# Altium PCB sara-n210_breakout.PcbDoc
Units mm, origin at the board's own origin, x right, y up, seen from the top; angles counter-clockwise.
Board outline 25 x 62.55 mm, 4 copper layers (L1, L2, L3 (PWR), L4), stack 1.584 mm thick; 29 components, 24 nets, 180 pads, 60 vias.
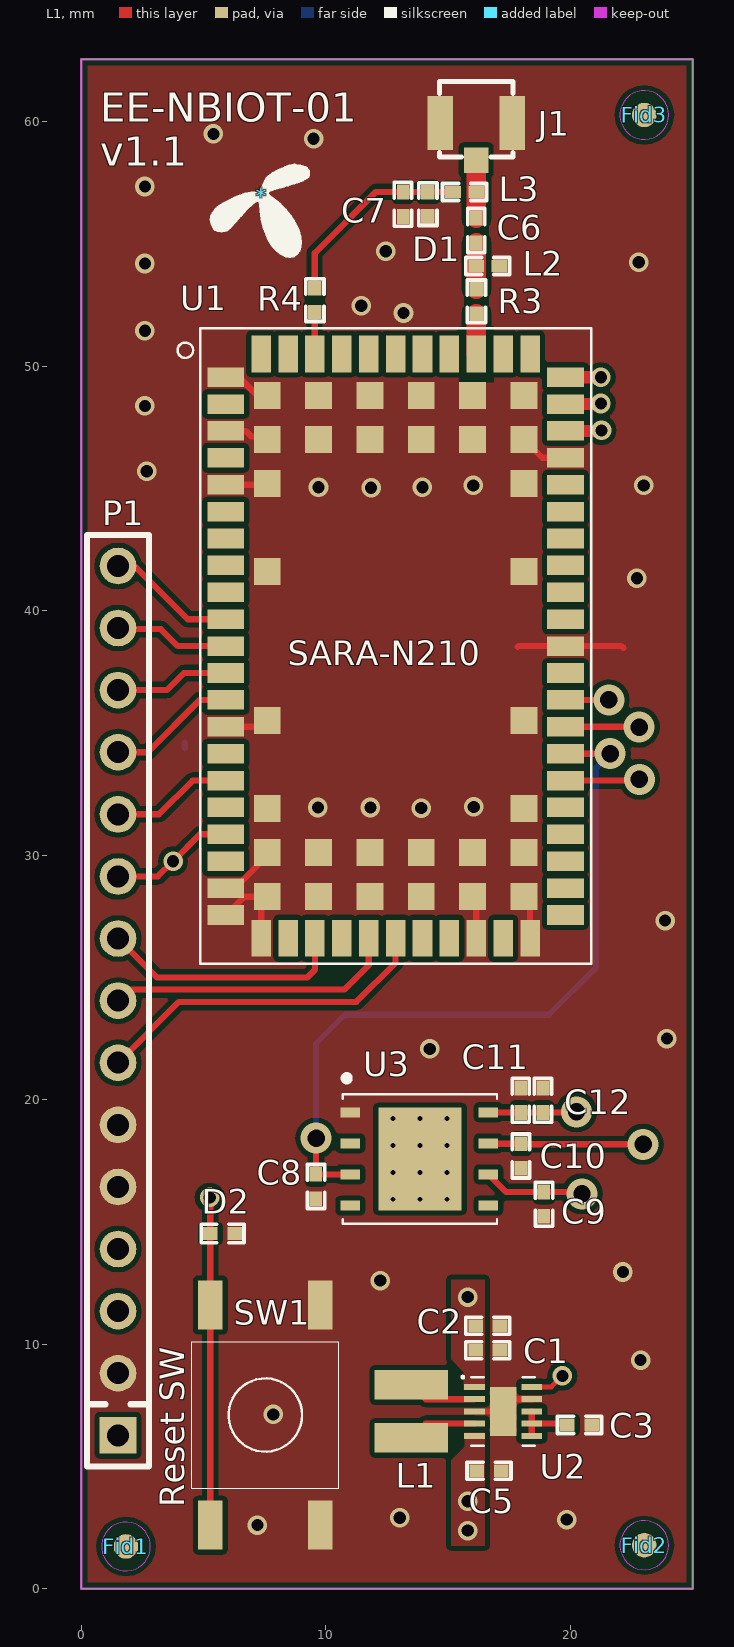
[diagram p0: L1 view]
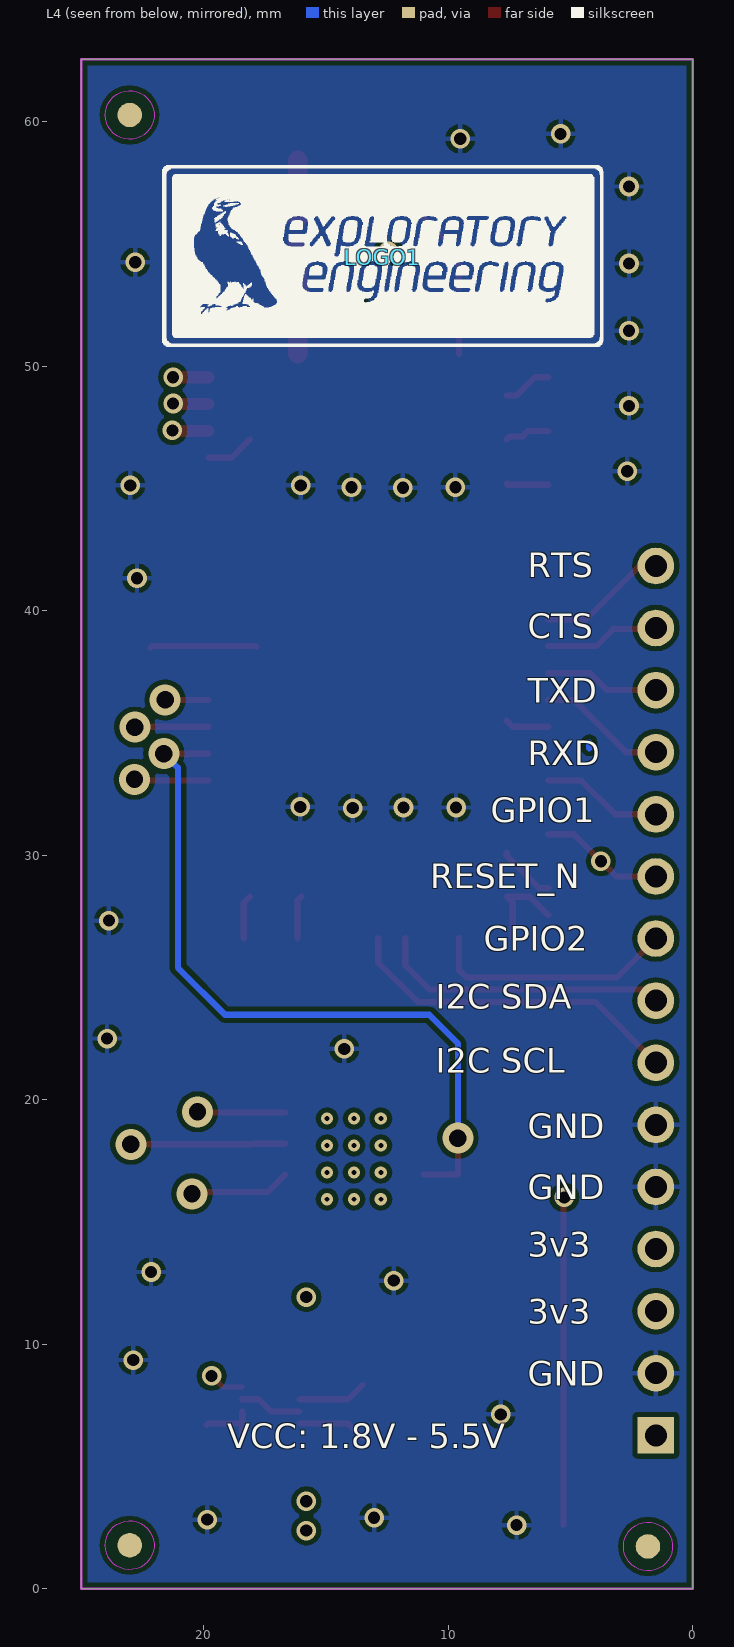
[diagram p1: L4 view, seen from below]
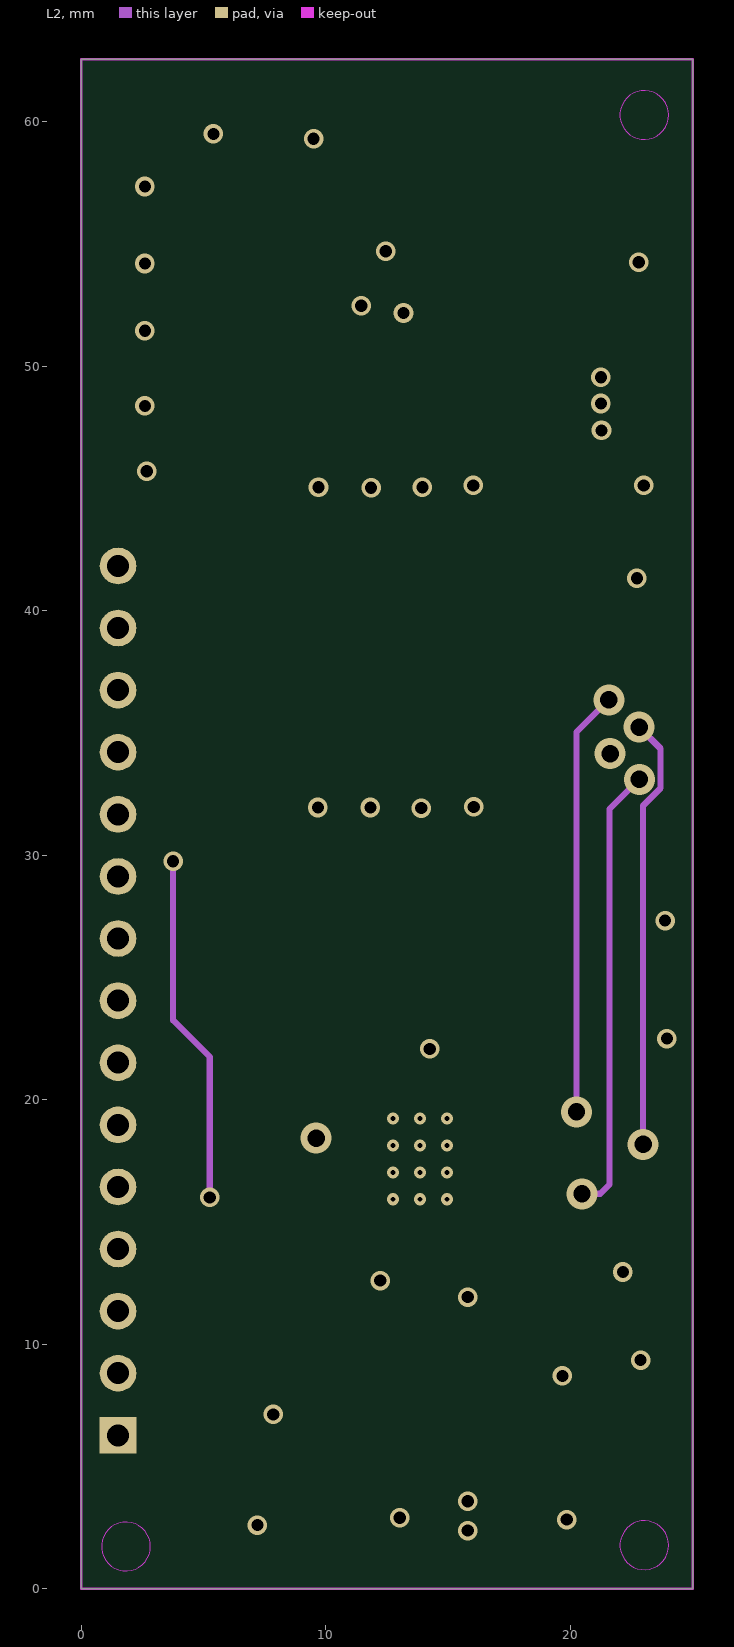
[diagram p2: L2]
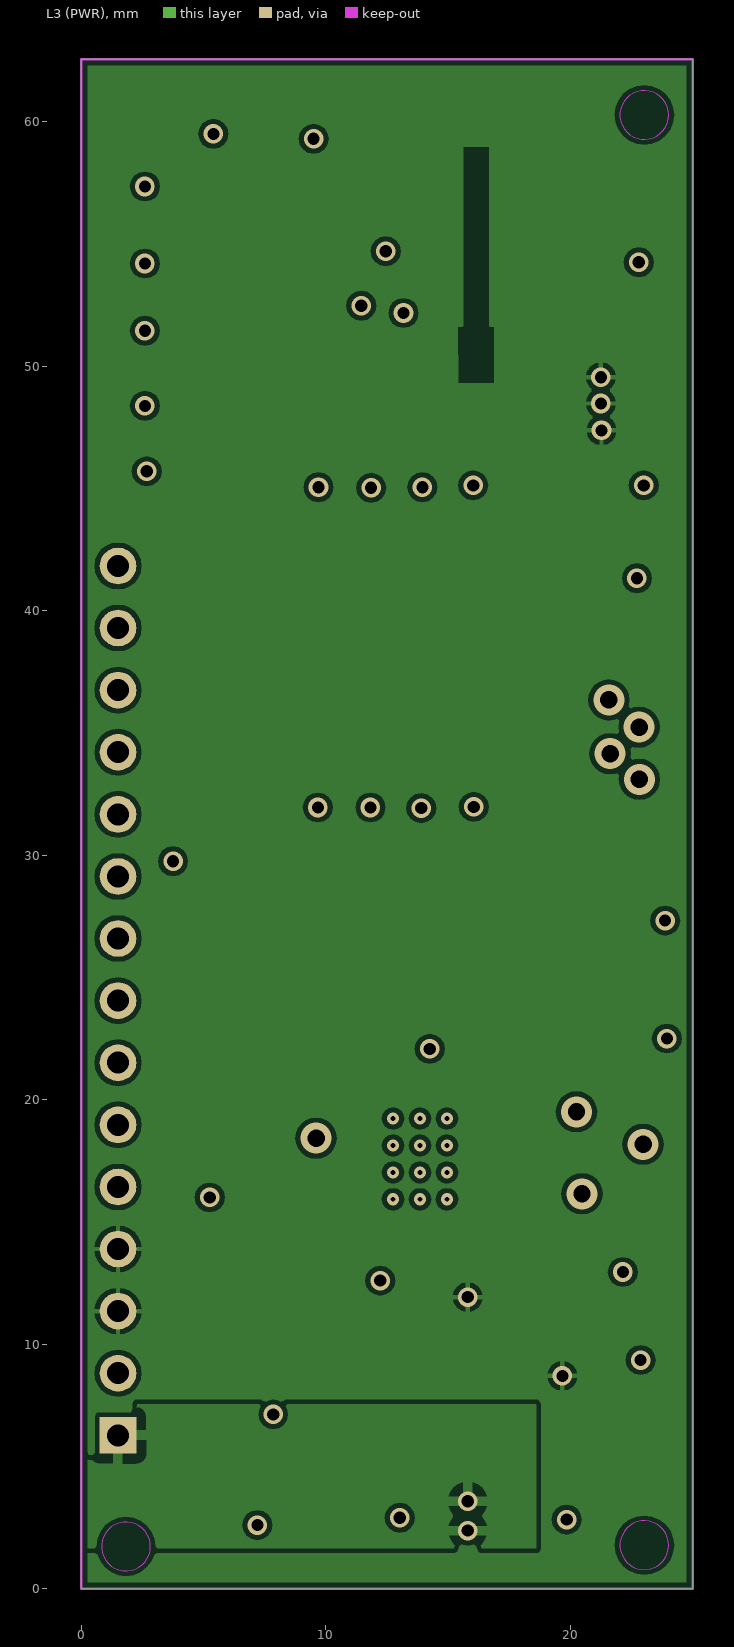
[diagram p3: L3 (PWR)]
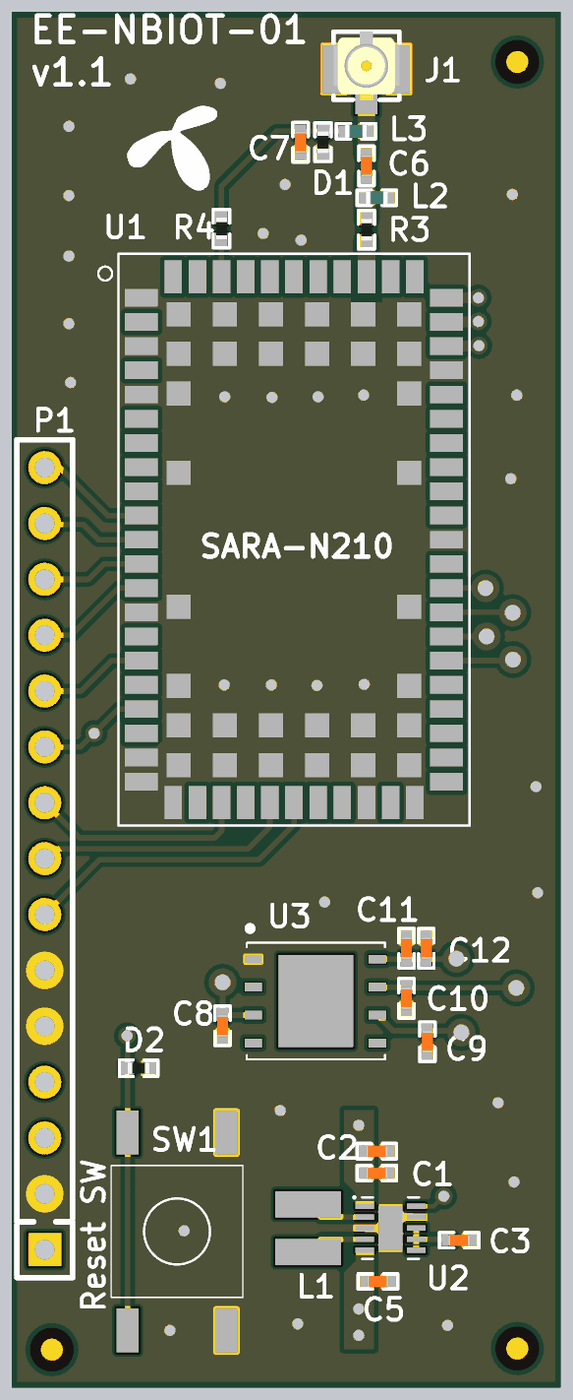
[diagram p4: 3D render of the assembled board from above, using the file's embedded part models]

## Layer stack, top to bottom
Top Solder: solder mask 0.0102, Solder Resist, Dk 3.5
L1: signal copper 0.0347
Dielectric 1: core 0.2, FR-4, Dk 4.2
L2: signal copper 0.0174
Dielectric 3: prepreg 1.08, Dk 4.2
L3 (PWR): signal copper 0.0174
Dielectric 2: core 0.2, Dk 4.2
L4: signal copper 0.0347
Bottom Solder: solder mask 0.0102, Solder Resist, Dk 3.5

## Board outline
0,0 25,0 25,62.55 0,62.55

## Design rules (kind name [scope] priority, off if disabled: settings)
Clearance [All] p1: gap=0.1 ignorepadtopadclearanceinfootprint=FALSE except(0: Arc-Hole Track-Hole SMDPad-Hole THPad-Hole Via-Hole Fill-Hole Poly-Hole Region-Hole Text-Hole; 0.2: Arc-Fill Arc-Poly Arc-Region Track-Fill Track-Poly Track-Region SMDPad-Fill SMDPad-Poly SMDPad-Region THPad-Fill THPad-Poly THPad-Region Via-Fill Via-Poly Via-Region Fill-Fill Fill-Poly Fill-Region Poly-Poly Poly-Region Region-Region)
HoleSize [All] p1: absolutevalues=TRUE maxlimit=3 minlimit=0.025 maxpercent=80.000 minpercent=20.000
HoleToHoleClearance [All] p1: gap=0.1 allowstackedmicrovias=TRUE
MinimumSolderMaskSliver [All] p1: minsoldermaskwidth=0.1
PlaneClearance [All] p1: clearance=0.5
PlaneConnect [All] p1: planeconnectstyle=Relief reliefexpansion=0.5 reliefentries=4 reliefconductorwidth=0.2 reliefairgap=0.2
PolygonConnect L1-3v3_PolygonConnect [InNet('3v3') vs OnTopLayer and InNet('3v3')] p1: connectstyle=Direct reliefconductorwidth=0.254 reliefentries=4 polygonreliefangle="90 Angle" airgapwidth=0.254
PolygonConnect L1-GND_PolygonConnect [InNet('GND') vs OnTopLayer and InNet('GND')] p2: connectstyle=Direct reliefconductorwidth=0.254 reliefentries=4 polygonreliefangle="90 Angle" airgapwidth=0.254
PolygonConnect L1-V_IN_PolygonConnect [InNet('V_IN') vs OnTopLayer] p3: connectstyle=Direct reliefconductorwidth=0.254 reliefentries=4 polygonreliefangle="90 Angle" airgapwidth=0.254
PolygonConnect L3-Vin_PolygonConnect [InNet('V_IN') vs OnMid] p4: connectstyle=Relief reliefconductorwidth=0.4 reliefentries=4 polygonreliefangle="90 Angle" airgapwidth=0.4
PolygonConnect [All] p5: connectstyle=Relief reliefconductorwidth=0.2 reliefentries=4 polygonreliefangle="90 Angle" airgapwidth=0.2
RoutingCorners [All] p1: cornerstyle=45-Degree minsetback=0.2 maxsetback=0.2
RoutingVias [All] p1: holewidth=0.5 width=0.75 viastyle="Through Hole" minholewidth=0.3 minwidth=1 maxholewidth=1 maxwidth=2
SilkToSilkClearance [All] p1: silktosilkclearance=0.1
SilkToSolderMaskClearance [IsPad] p1: minsilkscreentomaskgap=0.1 clearancetoexposedcopper=TRUE
SolderMaskExpansion [All] p1: expansion=0.1
Width [All] p1: maxlimit=1 minlimit=0.1 preferedwidth=0.2 minimp=50.000000 maximp=50.000000 favimp=50.000000
22 further rules are at their usual default settings.

## Classes and differential pairs
net class IMP50: ANT NetC6_1 NetC6_2

## Components (designator, comment, footprint, x,y, rotation, side; value= is the part's Value field where it differs from the comment)
* "TELENOR_LOGO" TELENOR_4mmx3.8mm 7.375,56.975 r0 top
C1 "10µF" CAPC1005X04L 16.625,9.75 r180 top
C2 "10µF" CAPC1005X04L 16.625,10.75 r180 top
C3 "100nF" CAPC1005X04L 20.375,6.7 r180 top
C5 "10µF" CAPC1005X04L 16.675,4.825 r180 top
C6 "33pF" CAPC1005X04L 16.15,55.55 r90 top
C7 "27pF" CAPC1005X04L 13.15,56.625 r270 top
C8 "47pF" CAPC1005X04L 9.6,16.45 r90 top
C9 "47pF" CAPC1005X04L 18.925,15.725 r90 top
C10 "47pF" CAPC1005X04L 17.975,17.7 r90 top
C11 "47pF" CAPC1005X04L 17.975,19.975 r270 top
C12 "100nF" CAPC1005X04L 18.875,19.975 r270 top
D1 "PESD0402-140" RESC1005X04L 14.175,56.625 r270 top
D2 "B72590T8140S160" RESC1005X04L 5.775,14.525 r0 top
Fid1 "Fiducial mark" Fiducial 1.825,1.725 r90 top
Fid2 "Fiducial mark" Fiducial 23.025,1.775 r90 top
Fid3 "Fiducial mark" Fiducial 23.025,60.275 r90 top
J1 "U.FL-R-SMT-1(10)" COAXIAL-UFL 16.15,59.95 r0 top
L1 "1.5µF" INDP3030X11L 13.5,7.25 r90 top
L2 "39nH" INDC1005X04L 16.625,54.1 r180 top
L3 "82nH" INDC1005X04L 15.675,57.125 r0 top
LOGO1 "EE LOGO" EE_LOGO 12.7,54.45 r180 bottom
P1 "2.54mm" HDR_1x15_2.54mm_THRU 1.5,24.05 r90 top
R3 "0.0" RESC1005X04L 16.156,52.649 r90 top
R4 "10k" RESC1005X04L 9.55,52.7 r90 top
SW1 "RS-014R05B1-SMA10 RT" RS-014R05B1-SMA10 7.525,7.1 r90 top
U1 "SARA-N210-02B" UB-SARA-N2 12.854,38.552 r0 top
U2 "TPS63031DSKR" SON50P250X80_HS-11N 17.25,7.25 r0 top
U3 "SkySIM Argo 512 M2M SMD" QFN127P500X600X90_HS-9N 13.85,17.575 r270 top

## Footprints (in the part's own frame and the unit in brackets; to place one, negate y for a bottom-side part, rotate by r counter-clockwise, add the part's x,y. Pads: shape width x height; smd on the part's side, far side on the other; paste and mask are expansions set on the pad)
CAPC1005X04L [mm]
  rect 0.6x0.5 smd: 1(-0.5,0) 2(0.5,0)
  silkscreen extent -0.9,-0.35 0.9,0.35, body extent -0.51,-0.25 0.51,0.25, height 0.5
COAXIAL-UFL [mm] "U.FL-R-SMT"
  rect 1x1.05 smd: 1(0,-1.525)
  rect 1.05x2.2 smd: 2(-1.475,0) 2(1.475,0)
  silkscreen extent -1.5,-1.4 1.5,1.7, body extent -1.5,-1.4 1.5,1.7, height 1.25
EE_LOGO [mm] "Exploratory Engineering Logo"
  silkscreen extent -8.98,-3.65 9.05,3.74
Fiducial [mm]
  round 1 smd paste-10 mask+0.5: 0(0,0)
  round 1 smd far side paste-10 mask+0.5: 0(0,0)
  Keep-Out Layer circle w0.01: c0,0 r1
HDR_1x15_2.54mm_THRU [mm] "Header, Thru-hole, 2.54mm, 1x15"
  rect 1.5x1.5 hole 0.9: 1(-17.78,0)
  round 1.5 hole 0.9: 2(-15.24,0) 3(-12.7,0) 4(-10.16,0) 5(-7.62,0) 6(-5.08,0) 7(-2.54,0) 8(0,0) 9(2.54,0) 10(5.08,0) 11(7.62,0) 12(10.16,0) 13(12.7,0) 14(15.24,0) 15(17.78,0)
  silkscreen extent -19.05,-1.27 19.05,1.27
INDC1005X04L [mm]
  rect 0.65x0.5 smd: 1(-0.475,0) 2(0.475,0)
  silkscreen extent -0.9,-0.35 0.9,0.35, body extent -0.5,-0.3 0.5,0.3, height 0.5
INDP3030X11L [mm] "Precision Wire Wound Inductor, 2-Leads, Body 3,00x3,00mm, IPC High Density"
  rect 1.2x3 smd: 1(-1.085,0) 2(1.085,0)
  body extent -1.55,-1.55 1.55,1.55, height 1.1
QFN127P500X600X90_HS-9N [mm] "QFN, 8-Leads, Body 5,00x6,00mm, Pitch 1,27mm, Thermal Pad 4,20x3,40mm, IPC Medium Density"
  rect 0.4x0.8 smd mask+0.05: 1(-1.905,-2.85) 2(-0.635,-2.85) 3(0.635,-2.85) 4(1.905,-2.85) 5(1.905,2.8) 6(0.635,2.8) 7(-0.635,2.8) 8(-1.905,2.8)
  rect 4.2x3.4 smd: 9(0,0)
  silkscreen extent -3.42,-3.15 2.65,3.15, body extent -2.5,-3 2.5,3, height 0.9
RESC1005X04L [mm]
  rect 0.6x0.55 smd: 1(-0.5,0) 2(0.5,0)
  silkscreen extent -0.87,-0.38 0.88,0.38, body extent -0.5,-0.25 0.5,0.25, height 0.3
RS-014R05B1-SMA10 [mm] "Switch, Tactile, SPST-NO, 0.05A, 12V"
  rect 2x1 smd paste+0 mask+0.1: 1(-4.5,2.25) 1(4.5,2.25) 2(-4.5,-2.25) 2(4.5,-2.25)
  silkscreen extent -3,-3 3,3, body extent -3,-3 3,3, height 5
SON50P250X80_HS-11N [mm] "SON, 10-Leads, Body 2,50x2,50mm, Pitch 0,50mm, Thermal Pad 2,00x1,09mm, IPC Medium Density"
  rect 0.85x0.25 smd: 1(-1.17,1) 2(-1.17,0.5) 3(-1.17,0) 4(-1.17,-0.5) 5(-1.17,-1) 6(1.17,-1) 7(1.17,-0.5) 8(1.17,0) 9(1.17,0.5) 10(1.17,1)
  rect 1.09x2 smd: 11(0,0)
  silkscreen extent -1.7,-1.4 1.3,1.45, body extent -1.3,-1.3 1.3,1.3, height 0.8
TELENOR_4mmx3.8mm [mm] "Telenor Logo, 4mm x 3.8mm (W x H)"
  silkscreen extent -2.07,-2.5 1.93,1.26
UB-SARA-N2 [mm] "uBlox Sara-N2 NB-IoT LGA footprint"
  rect 1.5x0.8 smd paste+0 mask+0: 1(-6.95,11) 2(-6.95,9.9) 3(-6.95,8.8) 4(-6.95,7.7) 5(-6.95,6.6) 6(-6.95,5.5) 7(-6.95,4.4) 8(-6.95,3.3) 9(-6.95,2.2) 10(-6.95,1.1) 11(-6.95,0) 12(-6.95,-1.1) 13(-6.95,-2.2) 14(-6.95,-3.3) 15(-6.95,-4.4) 16(-6.95,-5.5) 17(-6.95,-6.6) 18(-6.95,-7.7) 19(-6.95,-8.8) 20(-6.95,-9.9) 21(-6.95,-11) 33(6.95,-11) 34(6.95,-9.9) 35(6.95,-8.8) 36(6.95,-7.7) 37(6.95,-6.6) 38(6.95,-5.5) 39(6.95,-4.4) 40(6.95,-3.3) 41(6.95,-2.2) 42(6.95,-1.1) 43(6.95,0) 44(6.95,1.1) 45(6.95,2.2) 46(6.95,3.3) 47(6.95,4.4) 48(6.95,5.5) 49(6.95,6.6) 50(6.95,7.7) 51(6.95,8.8) 52(6.95,9.9) 53(6.95,11)
  rect 0.8x1.5 smd paste+0 mask+0: 22(-5.5,-11.95) 23(-4.4,-11.95) 24(-3.3,-11.95) 25(-2.2,-11.95) 26(-1.1,-11.95) 27(0,-11.95) 28(1.1,-11.95) 29(2.2,-11.95) 30(3.3,-11.95) 31(4.4,-11.95) 32(5.5,-11.95) 54(5.5,11.95) 55(4.4,11.95) 56(3.3,11.95) 57(2.2,11.95) 58(1.1,11.95) 59(0,11.95) 60(-1.1,11.95) 61(-2.2,11.95) 62(-3.3,11.95) 63(-4.4,11.95) 64(-5.5,11.95)
  rect 1.1x1.1 smd paste+0 mask+0: 65(-5.25,10.25) 66(-3.15,10.25) 67(-1.05,10.25) 68(1.05,10.25) 69(3.15,10.25) 70(5.25,10.25) 71(-5.25,8.45) 72(-3.15,8.45) 73(-1.05,8.45) 74(1.05,8.45) 75(3.15,8.45) 76(5.25,8.45) 77(-5.25,6.65) 78(5.25,6.65) 79(-5.25,3.05) 80(5.25,3.05) 81(-5.25,-3.05) 82(5.25,-3.05) 83(-5.25,-6.65) 84(5.25,-6.65) 85(-5.25,-8.45) 86(-3.15,-8.45) 87(-1.05,-8.45) 88(1.05,-8.45) 89(3.15,-8.45) 90(5.25,-8.45) 91(-5.25,-10.25) 92(-3.15,-10.25) 93(-1.05,-10.25) 94(1.05,-10.25) 95(3.15,-10.25) 96(5.25,-10.25)
  silkscreen extent -8.92,-13 8,13

## Part data
C1 C2 C5: library part GRM155R60J106ME15D, "CAP CER 10UF 6.3V X5R 0402", Manufacturer="Murata Electronics North America", Operating Temperature="-55°C ~ 85°C", Package / Case="0402 (1005 Metric)", Ratings=-, Supplier Part Number 1=490-13238-6-ND, Temperature Coefficient=X5R, Tolerance=±20%, Voltage - Rated=6.3V, Applications="General Purpose", Capacitance=10µF, Category=Capacitors, ComponentLink1Description=http://psearch.en.murata.com/capacitor/product/GRM155R60J106ME15#.pdf, ComponentLink1URL=http://psearch.en.murata.com/capacitor/product/GRM155R60J106ME15#.pdf, Features="Derating Recommended", Height - Seated (Max)=-, Lead Spacing=-, Lead Style=-, Manufacturer Part Number=GRM155R60J106ME15D, Mounting Type="Surface Mount, MLCC", Packaging=Digi-Reel®, Part Status=Active, Pricing 1="1=0.23, 10=0.159, 50=0.0966, 100=0.0811, 250=0.06564, 500=0.0579, 1000=0.04922, 5000=0.0415 (USD)", RoHS="RoHS Compliant", Size / Dimension="0.039\" L x 0.020\" W (1.00mm x 0.50mm)", Stock 1=46293, Supplier 1=Digi-Key, Thickness (Max)="0.026\" (0.65mm)"
C3 C12: library part GRM155R71C104KA88D, "CAP CER 100nF 16V X7R 0402", Manufacturer="Murata Electronics North America", Operating Temperature="-55°C ~ 125°C", Package / Case="0402 (1005 Metric)", Ratings=-, Supplier Part Number 1=490-3261-6-ND, Temperature Coefficient=X7R, Tolerance=±10%, Voltage - Rated=16V, Applications="General Purpose", Capacitance=100nF, Category=Capacitors, ComponentLink1Description=http://www.murata.com/~/media/webrenewal/support/library/catalog/products/capacitor/mlcc/c02e.pdf, ComponentLink1URL=http://www.murata.com/~/media/webrenewal/support/library/catalog/products/capacitor/mlcc/c02e.pdf, Features=-, Height - Seated (Max)=-, Lead Spacing=-, Lead Style=-, Manufacturer Part Number=GRM155R71C104KA88D, Mounting Type="Surface Mount, MLCC", Packaging=Digi-Reel®, Pricing 1="1=0.16, 10=0.023, 50=0.0126, 100=0.0107, 250=0.00872, 500=0.00746, 1000=0.00581, 5000=0.00485 (EUR)", RoHS="RoHS Compliant", Size / Dimension="0.039\" L x 0.020\" W (1.00mm x 0.50mm)", Stock 1=24649903, Supplier 1=Digi-Key, Thickness (Max)="0.022\" (0.55mm)"
C6: library part GRM1555C1H330JZ01D, "CAP CER 33PF 50V NP0 0402", Manufacturer="Murata Electronics North America", Operating Temperature="-55°C ~ 125°C", Package / Case="0402 (1005 Metric)", Ratings=-, Supplier Part Number 1=490-3220-6-ND, Temperature Coefficient="C0G, NP0", Tolerance=±5%, Voltage - Rated=50V, Applications="General Purpose", Capacitance=33pF, Category=Capacitors, ComponentLink1Description=http://media.digikey.com/pdf/Data%20Sheets/Murata%20PDFs/Chip%20Monolithic%20Ceramic%20Caps.pdf, ComponentLink1URL=http://media.digikey.com/pdf/Data%20Sheets/Murata%20PDFs/Chip%20Monolithic%20Ceramic%20Caps.pdf, Features=-, Height - Seated (Max)=-, Lead Spacing=-, Lead Style=-, Manufacturer Part Number=GRM1555C1H330JZ01D, Mounting Type="Surface Mount, MLCC", Packaging=Digi-Reel®, Pricing 1="1=0 (EUR)", RoHS="RoHS Compliant", Size / Dimension="0.039\" L x 0.020\" W (1.00mm x 0.50mm)", Stock 1=0, Supplier 1=Digi-Key, Thickness (Max)="0.022\" (0.55mm)"
C7: library part GRM1555C1H270JA01D, "CAP CER 27PF 50V C0G/NP0 0402", Manufacturer="Murata Electronics North America", Operating Temperature="-55°C ~ 125°C", Package / Case="0402 (1005 Metric)", Ratings=-, Supplier Part Number 1=490-5869-1-ND, Temperature Coefficient="C0G, NP0", Tolerance=±5%, Voltage - Rated=50V, Applications="General Purpose", Capacitance=27pF, Category=Capacitors, ComponentLink1Description=https://www.murata.com/~/media/webrenewal/support/library/catalog/products/capacitor/mlcc/c02e.ashx?la=en-us, ComponentLink1URL=https://www.murata.com/~/media/webrenewal/support/library/catalog/products/capacitor/mlcc/c02e.ashx?la=en-us, Features=-, Height - Seated (Max)=-, Lead Spacing=-, Lead Style=-, Manufacturer Part Number=GRM1555C1H270JA01D, Mounting Type="Surface Mount, MLCC", Notification="Current market demand for these product types have resulted in fluctuating and extending lead times. Lead times may differ.", Packaging="Cut Tape (CT)", Part Status=Active, Pricing 1="1=0.1, 10=0.019, 100=0.0087, 500=0.0062, 1000=0.00487, 2500=0.00443, 5000=0.00407 (USD)", RoHS="RoHS Compliant", Size / Dimension="0.039\" L x 0.020\" W (1.00mm x 0.50mm)", Stock 1=408258, Supplier 1=Digi-Key, Thickness (Max)="0.022\" (0.55mm)"
C8 C9 C10 C11: library part GRM1555C1H470JA01D, "CAP CER 47PF 50V C0G/NP0 0402", Manufacturer="Murata Electronics North America", Operating Temperature="-55°C ~ 125°C", Package / Case="0402 (1005 Metric)", Ratings=-, Supplier Part Number 1=490-5942-1-ND, Temperature Coefficient="C0G, NP0", Tolerance=±5%, Voltage - Rated=50V, Applications="General Purpose", Capacitance=47pF, Category=Capacitors, ComponentLink1Description=https://www.murata.com/~/media/webrenewal/support/library/catalog/products/capacitor/mlcc/c02e.ashx?la=en-us, ComponentLink1URL=https://www.murata.com/~/media/webrenewal/support/library/catalog/products/capacitor/mlcc/c02e.ashx?la=en-us, Features=-, Height - Seated (Max)=-, Lead Spacing=-, Lead Style=-, Manufacturer Part Number=GRM1555C1H470JA01D, Mounting Type="Surface Mount, MLCC", Notification="Current market demand for these product types have resulted in fluctuating and extending lead times. Lead times may differ.", Packaging="Cut Tape (CT)", Part Status=Active, Pricing 1="1=0.1, 10=0.014, 100=0.0062, 500=0.00442, 1000=0.00348, 2500=0.00316, 5000=0.00291 (USD)", RoHS="RoHS Compliant", Size / Dimension="0.039\" L x 0.020\" W (1.00mm x 0.50mm)", Stock 1=0, Supplier 1=Digi-Key, Thickness (Max)="0.022\" (0.55mm)"
D1: "TVS DIODE 14VWM 40VC 0402", Capacitance @ Frequency=-, Manufacturer="Littelfuse Inc.", Operating Temperature="-55°C ~ 125°C (TJ)", Package / Case="0402 (1005 Metric)", Power Line Protection=No, Supplier Device Package=0402, Supplier Part Number 1=PESD0402-140CT-ND, Voltage - Clamping (Max) @ Ipp=40V, Voltage - Reverse Standoff (Typ)="14V (Max)", Applications="Ethernet, HDMI", Category="Circuit Protection", ComponentLink1Description=http://www.littelfuse.com/~/media/electronics/product_specifications/polymer_esd_suppressors/littelfuse_polymer_esd_suppressor_pesd0402_140_product_specification.pdf.pdf, ComponentLink1URL=http://www.littelfuse.com/~/media/electronics/product_specifications/polymer_esd_suppressors/littelfuse_polymer_esd_suppressor_pesd0402_140_product_specification.pdf.pdf, Current - Peak Pulse (10/1000µs)=-, Manufacturer Part Number=PESD0402-140, Mounting Type="Surface Mount", Packaging="Cut Tape (CT)", Part Status=Active, Power - Peak Pulse=-, Pricing 1="1=0.61, 10=0.476, 25=0.4008, 100=0.3263, 250=0.2704, 500=0.22378, 1000=0.16783, 2500=0.15385, 5000=0.14452 (USD)", RoHS="RoHS Compliant", Stock 1=178325, Supplier 1=Digi-Key, Type=Zener, Voltage - Breakdown (Min)=-
D2: "VARISTOR 28V 2A 0402", Capacitance @ Frequency="10pF @ 1MHz", Manufacturer="EPCOS (TDK)", Operating Temperature="-55°C ~ 125°C (TA)", Package / Case="0402 (1005 Metric)", Supplier Part Number 1=495-3426-1-ND, Category="Circuit Protection", ComponentLink1Description=https://en.tdk.eu/inf/75/db/CTVS_14/Standard_series.pdf, ComponentLink1URL=https://en.tdk.eu/inf/75/db/CTVS_14/Standard_series.pdf, Energy=0.03J, Manufacturer Part Number=B72590T8140S160, Mounting Type="Surface Mount, MLCV", Packaging="Cut Tape (CT)", Part Status=Active, Pricing 1="1=0.43, 10=0.302, 25=0.2476, 100=0.198, 250=0.14404, 500=0.11702, 1000=0.09002, 2500=0.08102, 5000=0.07652 (USD)", RoHS="RoHS Compliant", Stock 1=18512, Supplier 1=Digi-Key
Fid1 Fid2 Fid3: library part Fiducial, "Fiducial Mark", Part Number=Fid-Mark, Artikkelnr Noca=N.A., Artikkelnr Simpro=N.A., Footprint Doc=Fiducial, LatestRevisionDate=2009-12-12, Pin Count=1, Published=2009-12-12, Publisher="Nordic Semiconductor"
J1: "CONN UMC JACK STR 50 OHM SMD", Dielectric Material="Liquid Crystal Polymer (LCP)", Frequency - Max=6GHz, Housing Color=Silver, Manufacturer="Hirose Electric Co Ltd", Operating Temperature="-40°C ~ 90°C", Supplier Part Number 1=H11891DKR-ND, Voltage Rating=-, Body Finish=Silver, Body Material="Phosphor Bronze", Cable Group=-, Category="Connectors, Interconnects", Center Contact Material="Phosphor Bronze", Center Contact Plating=Gold, ComponentLink1Description=http://media.digikey.com/pdf/Data%20Sheets/Hirose%20PDFs/UFL%20Series.pdf, ComponentLink1URL=http://media.digikey.com/pdf/Data%20Sheets/Hirose%20PDFs/UFL%20Series.pdf, Connector Style=U.FL, Connector Type="Jack, Male Pin", Contact Termination=Solder, Fastening Type=Snap-On, Features=-, Impedance="50 Ohm", Ingress Protection=-, Manufacturer Part Number=U.FL-R-SMT-1(10), Mounting Type="Surface Mount", Packaging=Digi-Reel®, Pricing 1="1=1.15, 10=1.013, 25=0.9532, 50=0.9138, 100=0.8739, 250=0.79448, 500=0.71504, 1000=0.63559 (EUR)", RoHS="RoHS Compliant", Shield Termination=Solder, Stock 1=124618, Supplier 1=Digi-Key
L1: library part LQH3NPZ1R5MGRL, "FIXED IND 1.5UH 2.04A 88.8 MOHM", DC Resistance (DCR)="88.8 mOhm Max", Manufacturer="Murata Electronics North America", Operating Temperature="-40°C ~ 85°C", Package / Case="1212 (3030 Metric)", Ratings=AEC-Q200, Supplier Part Number 1=490-15959-6-ND, Tolerance=±20%, Category="Inductors, Coils, Chokes", ComponentLink1Description=http://search.murata.co.jp/Ceramy/image/img/P02/JELF243A-9130.pdf, ComponentLink1URL=http://search.murata.co.jp/Ceramy/image/img/P02/JELF243A-9130.pdf, Height - Seated (Max)="0.039\" (1.00mm)", Inductance=1.5µF, Manufacturer Part Number=LQH3NPZ1R5MGRL, Material - Core=Ferrite, Mounting Type="Surface Mount", Packaging=Digi-Reel®, Part Status=Active, Pricing 1="1=0.44, 10=0.382, 100=0.2731, 500=0.22942, 1000=0.18573 (USD)", RoHS="RoHS Compliant", Shielding=Shielded, Size / Dimension="0.118\" L x 0.118\" W (3.00mm x 3.00mm)", Stock 1=5493, Supplier 1=Digi-Key, Supplier 2=Digi-Key, Supplier 3=Digi-Key, Supplier Device Package="1212 (3030 Metric)", Supplier Part Number 2=490-15959-1-ND, Supplier Part Number 3=490-15959-2-ND, Type=Wirewound
L2: library part LQG15HN39NJ02D, "FIXED IND 39NH 250MA 1.06 OHM", DC Resistance (DCR)="1.06 Ohm Max", Manufacturer="Murata Electronics North America", Operating Temperature="-55°C ~ 125°C", Package / Case="0402 (1005 Metric)", Q @ Freq="8 @ 100MHz", Ratings=-, Supplier Part Number 1=490-1092-1-ND, Tolerance=±5%, Category="Inductors, Coils, Chokes", ComponentLink1Description=http://search.murata.co.jp/Ceramy/image/img/P02/JELF243B-0009.pdf, ComponentLink1URL=http://search.murata.co.jp/Ceramy/image/img/P02/JELF243B-0009.pdf, Height - Seated (Max)="0.022\" (0.55mm)", Inductance=39nH, Manufacturer Part Number=LQG15HN39NJ02D, Material - Core=-, Mounting Type="Surface Mount", Packaging="Cut Tape (CT)", Part Status=Active, Pricing 1="1=0.1, 10=0.066, 100=0.0442, 500=0.0368, 1000=0.03091, 2500=0.0265 (USD)", RoHS="RoHS Compliant", Shielding=Unshielded, Size / Dimension="0.039\" L x 0.020\" W (1.00mm x 0.50mm)", Stock 1=10603, Supplier 1=Digi-Key, Supplier Device Package="0402 (1005 Metric)", Type=Multilayer
L3: library part LQG15HS82NJ02D, "FIXED IND 82NH 150MA 1.2 OHM SMD", Current - Saturation=-, Current Rating=150mA, DC Resistance (DCR)="1.2 Ohm Max", Frequency - Self Resonant=700MHz, Frequency - Test=100MHz, Manufacturer="Murata Electronics North America", Operating Temperature="-55°C ~ 125°C", Package / Case="0402 (1005 Metric)", Q @ Freq="8 @ 100MHz", Supplier Part Number 1=490-2634-6-ND, Tolerance=±5%, Category="Inductors, Coils, Chokes", ComponentLink1Description=http://search.murata.co.jp/Ceramy/image/img/PDF/ENG/L0075S0083LQG15HS.pdf, ComponentLink1URL=http://search.murata.co.jp/Ceramy/image/img/PDF/ENG/L0075S0083LQG15HS.pdf, Height - Seated (Max)="0.022\" (0.55mm)", Inductance=82nH, Manufacturer Part Number=LQG15HS82NJ02D, Material - Core=Air, Mounting Type="Surface Mount", Packaging=Digi-Reel®, Pricing 1="1=0.09, 10=0.061, 25=0.0548, 50=0.0474, 100=0.0425, 250=0.03948, 500=0.03646, 750=0.03464, 1000=0.0316 (EUR)", Ratings=-, RoHS="RoHS Compliant", Shielding=Unshielded, Size / Dimension="0.039\" L x 0.020\" W (1.00mm x 0.50mm)", Stock 1=28103, Supplier 1=Digi-Key, Type=Multilayer
LOGO1: library part EE-LOGO, "Exploratory Engineering Logo Silkscreen"
P1: library part HDR_1x15_2.54MM_MALE, "Header, 1x15, Pitch 2.54mm, Male", Pins=15, Pitch=2.54mm
R3: library part RC0402JR-070RL, "RES SMD 0.0OHM JUMPER 1/16W 0402", Manufacturer=Yageo, Operating Temperature="-55°C ~ 155°C", Package / Case="0402 (1005 Metric)", Power (Watts)="0.063W, 1/16W", Supplier Device Package=0402, Supplier Part Number 1=311-0.0JRDKR-ND, Temperature Coefficient=-, Tolerance=Jumper, Category=Resistors, ComponentLink1Description=http://www.yageo.com/NewPortal/yageodocoutput?fileName=/pdf/R-Chip/PYu-RC_Group_51_RoHS_L_3.pdf, ComponentLink1URL=http://www.yageo.com/NewPortal/yageodocoutput?fileName=/pdf/R-Chip/PYu-RC_Group_51_RoHS_L_3.pdf, Composition="Thick Film", Features="Moisture Resistant", Height="0.016\" (0.40mm)", Manufacturer Part Number=RC0402JR-070RL, Number of Terminations=2, Packaging=Digi-Reel®, Pricing 1="1=0.1, 10=0.013, 25=0.0092, 100=0.0053, 250=0.004, 500=0.0032, 1000=0.00236, 2500=0.00205, 5000=0.00169 (USD)", Resistance (Ohms)=0.0, RoHS="RoHS Compliant", Size / Dimension="0.039\" L x 0.020\" W (1.00mm x 0.50mm)", Stock 1=10063535, Supplier 1=Digi-Key
R4: library part MCS04020C1002FE000, "RES SMD 10K OHM 1% 1/10W 0402", Manufacturer="Vishay Beyschlag", Operating Temperature="-55°C ~ 155°C", Package / Case="0402 (1005 Metric)", Power (Watts)="0.1W, 1/10W", Supplier Device Package=0402, Supplier Part Number 1=MCS0402-10.0K-CFCT-ND, Temperature Coefficient=±50ppm/°C, Tolerance=±1%, Category=Resistors, ComponentLink1Description=http://www.vishay.com/docs/28705/mcx0x0xpro.pdf, ComponentLink1URL=http://www.vishay.com/docs/28705/mcx0x0xpro.pdf, Composition="Thin Film", Failure Rate=-, Features=-, Height - Seated (Max)="0.015\" (0.37mm)", Manufacturer Part Number=MCS04020C1002FE000, Packaging="Cut Tape (CT)", Part Status=Active, Pricing 1="1=0.3, 10=0.254, 100=0.0993, 1000=0.04158, 2500=0.03812, 5000=0.03465 (USD)", Resistance=10k, RoHS="RoHS Compliant", Size / Dimension="0.039\" L x 0.020\" W (1.00mm x 0.50mm)", Stock 1=18685, Supplier 1=Digi-Key
SW1: "SWITCH TACTILE SPST-NO 0.05A 12V", Contact Rating @ Voltage="0.05A @ 12VDC", Illumination Type, Color=-, Manufacturer=C&K, Operating Force=160gf, Supplier Part Number 1=CKN10392DKR-ND, Actuator Height off PCB, Vertical=5.00mm, Actuator Length, Right Angle=-, Actuator Material="Polyamide (PA), Nylon", Actuator Orientation="Top Actuated", Actuator Type=Standard, Category=Switches, Circuit=SPST-NO, ComponentLink1Description=http://media.digikey.com/pdf/Data%20Sheets/C&K/RS-014R05__-SMA%20_RT.pdf, ComponentLink1URL=http://media.digikey.com/pdf/Data%20Sheets/C&K/RS-014R05__-SMA%20_RT.pdf, Features=-, Illumination=Non-Illuminated, Illumination Voltage (Nominal)=-, Ingress Protection=-, Manufacturer Part Number="RS-014R05B1-SMA10 RT", Mechanical Life="100,000 Cycles", Mounting Type="Surface Mount", Operating Temperature=-, Outline="6.00mm x 6.00mm", Packaging=Digi-Reel®, Part Status=Active, Pricing 1="1=0.36, 10=0.348, 25=0.3356, 50=0.3232, 100=0.3108, 250=0.28588, 500=0.2486 (USD)", RoHS="RoHS Compliant", Stock 1=35708, Supplier 1=Digi-Key, Switch Function=Off-Mom, Switch Travel=0.25mm, Termination Style="Gull Wing"
U1: library part SARA-N2, "uBlox Sara N210", Manufacturer Part Number=SARA-N210-02B
U2: "IC REG BUCK BST 3.3V 0.9A 10SON", Current - Output="900mA (Switch)", Frequency - Switching=2.4MHz, Manufacturer="Texas Instruments", Operating Temperature="-40°C ~ 85°C (TA)", Package / Case="10-WFDFN Exposed Pad", Supplier Device Package="10-SON (2.5x2.5)", Supplier Part Number 1=296-39461-6-ND, Voltage - Input (Max)=5.5V, Voltage - Input (Min)=1.8V, Voltage - Output (Max)=-, Voltage - Output (Min/Fixed)=3.3V, Category="Integrated Circuits (ICs)", ComponentLink1Description=http://www.ti.com/lit/ds/symlink/tps63030.pdf, ComponentLink1URL=http://www.ti.com/lit/ds/symlink/tps63030.pdf, Function=Step-Up/Step-Down, Manufacturer Part Number=TPS63031DSKR, Mounting Type="Surface Mount", Number of Outputs=1, Output Configuration=Positive, Output Type=Fixed, Packaging=Digi-Reel®, Part Status=Active, Pricing 1="1=1.93, 10=1.731, 100=1.3909, 500=1.14278, 1000=0.94688 (USD)", RoHS="RoHS Compliant", Stock 1=14803, Supplier 1=Digi-Key, Supplier 2=Digi-Key, Supplier 3=Digi-Key, Supplier Part Number 2=296-39461-1-ND, Supplier Part Number 3=296-39461-2-ND, Synchronous Rectifier=Yes, Topology=Buck-Boost
U3: library part SKYSIM-ARGO-LTE-MFF2, "SkySIM® Argo 512 M2M SMD - LTE"

## Via types
v1: diameter 0.8, hole 0.5, L1 to L4, tented both sides, 40 vias
v2: diameter 0.5, hole 0.2, L1 to L4, tented both sides, 12 vias
v3: diameter 1.27, hole 0.711, L1 to L4, tented both sides, 8 vias

## Nets (pads, with @x,y where several pads share a name; then routed paths per layer and width w, separated by ;. In a path a pad name is that pad's centre, name@x,y a point inside that pad or via, vN(x,y) a via of type N, cw(c..) or ccw(c..) an arc to the next point about the centre after c; other vN are vias at no path point)
3v3: C1.2 C2.2 P1.3 P1.4 U1.51 U1.52 U1.53 U2.1 U2.10 | length 5.8
  L1 w0.2: U2.10 19.225,8.25 v1(19.675,8.7)
  L1 w0.5: U1.51 21.252,47.352 v1(21.275,47.375) ; U1.52 21.227,48.452 v1(21.25,48.475) ; U1.53 21.248,49.552 v1(21.25,49.55)
  other v1: 15.8,11.925
ANT: R3.1 U1.56 | length 1.6
  L1 w0.254: R3.1@16.154,52.147 R3.1
  L1 w0.8: U1.56 R3.1@16.154,52.147
ANT_DET: R4.1 U1.62 | length 1.7
  L1 w0.254: R4.1 9.55,50.506 U1.62
CTS: P1.14 U1.11 | length 4.7
  L1 w0.254: P1.14 1.54,39.25 3.25,39.25 3.948,38.552 U1.11
GND: C1.1 C2.1 C3.1 C5.1 C7.2 C8.1 C9.1 C10.1 C11.1 C12.1 D1.2 D2.2 J1.2 L2.1 P1.2 P1.5 P1.6 SW1.2 U1.1 U1.3 U1.5 U1.14 U1.20 U1.21 U1.22 U1.30 U1.32 U1.43 U1.50 U1.65 U1.66 U1.67 U1.68 U1.69 U1.70 U1.71 U1.72 U1.73 U1.74 U1.75 U1.76 U1.77 U1.78 U1.79 U1.80 U1.81 U1.82 U1.83 U1.84 U1.85 U1.86 U1.87 U1.88 U1.89 U1.90 U1.91 U1.92 U1.93 U1.94 U1.95 U1.96 U2.3 U2.9 U2.11 U3.1 | length 26.1
  L1 w0.254: U1.21 6.654,28.302 U1.91 7.354,28.052 U1.22 ; U1.20 6.275,28.652 7.604,29.981 U1.85 ; U1.14 7.354,35.252 U1.81 ; U1.5 7.554,45.152 U1.77 ; U1.3 6.723,47.352 6.95,47.125 7.481,47.125 U1.71 ; U1.1 6.448,49.552 7.198,48.802 U1.65 ; U1.95 16.154,28.152 U1.30 ; U2.3 U2.11 17.75,7.75 U2.9 ; 17.85,38.525 17.877,38.552 U1.43 22.098,38.552 22.175,38.475 ; U1.96 18.354,28.052 U1.32 ; U1.76 18.854,46.252 U1.50
  other v1: 7.2,2.6 19.85,2.825 13.025,2.9 7.85,7.125 22.875,9.35 12.225,12.6 22.15,12.95 14.25,22.075 23.95,22.5 23.875,27.325 13.9,31.925 9.675,31.95 11.825,31.95 16.05,31.975 22.725,41.325 11.85,45.025 9.7,45.05 13.95,45.05 16.025,45.125 23,45.125 2.675,45.7 2.6,48.375 2.6,51.45 13.175,52.175 11.45,52.475 2.6,54.2 22.8,54.25 12.45,54.7 2.6,57.35 9.5,59.3 5.4,59.5
GPIO1: P1.11 U1.16 | length 5
  L1 w0.254: P1.11 3.17,31.67 4.552,33.052 U1.16
GPIO2: P1.9 U1.24 | length 10.1
  L1 w0.254: P1.9 3.09,25 9.25,25 9.554,25.304 U1.24
I2C_SCL: P1.7 U1.27 | length 14
  L1 w0.254: P1.7 3.99,24 11.25,24 12.854,25.604 U1.27
I2C_SDA: P1.8 U1.26 | length 12
  L1 w0.254: P1.8 1.95,24.5 10.75,24.5 11.754,25.504 U1.26
NetC3_2: C3.2 U2.6 U2.7 U2.8 | length 2.5
  L1 w0.254: U2.6 U2.7 ; U2.8 U2.7 ; C3.2 19.825,6.75 U2.7
NetC6_1: C6.1 L2.2 R3.2 | length 1.9
  L1 w0.254: C6.1 C6.1@16.156,55.044
  L1 w0.8: R3.2 C6.1@16.156,55.044
NetC6_2: C6.2 J1.1 L3.2 | length 2.4
  L1 w0.8: C6.2 J1.1
NetC7_1: C7.1 D1.1 L3.1 R4.2 | length 8.1
  L1 w0.254: R4.2 9.55,54.625 12.05,57.125 C7.1 D1.1 L3.1
NetL1_1: L1.1 U2.4 | length 2.8
  L1 w0.254: L1.1 14.085,6.75 U2.4
NetL1_2: L1.2 U2.2 | length 2.8
  L1 w0.254: L1.2 14.085,7.75 U2.2
RESET_N: D2.1 P1.10 SW1.1 U1.18 | length 32.9
  L1 w0.254: P1.10 3.13,29.13 v1(3.75,29.75) 4.852,30.852 U1.18 ; v1(5.25,16) 5.275,15.975 D2.1 5.275,11.6 SW1.1@5.275,2.6
  L2 w0.254: v1(3.75,29.75) 3.75,23.25 5.25,21.75 v1(5.25,16)
RTS: P1.15 U1.10 | length 5.3
  L1 w0.254: P1.15 2.17,41.83 4.348,39.652 U1.10
RXD: P1.12 U1.13 | length 5.3
  L1 w0.254: P1.12 2.71,34.21 4.852,36.352 U1.13
SIM_CLK: C9.2 U1.38 U3.6 | length 25.6
  L1 w0.254: U3.6 17.365,16.225 C9.2 20.4,16.225 v3(20.475,16.15) ; U1.38 22.777,33.052 v3(22.825,33.1)
  L2 w0.254: v3(20.475,16.15) 21.225,16.15 21.6,16.525 21.6,31.875 v3(22.825,33.1)
SIM_IO: C8.2 U1.39 U3.3 | length 30.3
  L1 w0.254: v3(9.6,18.425) C8.2 9.61,16.94 U3.3 ; U1.39 21.623,34.152 v3(21.625,34.15)
  L4 w0.254: v3(9.6,18.425) 9.6,22.3 10.775,23.475 19.125,23.475 21.05,25.4 21.05,33.575 v3(21.625,34.15)
SIM_RST: C10.2 U1.40 U3.7 | length 27.1
  L1 w0.254: U3.7 16.66,18.2 C10.2 18,18.175 v3(22.975,18.175) ; U1.40 22.798,35.252 v3(22.814,35.236)
  L2 w0.254: v3(22.814,35.236) 23.687,34.363 23.687,32.743 22.975,32.031 v3(22.975,18.175)
TXD: P1.13 U1.12 | length 4.7
  L1 w0.254: P1.13 3.5,36.75 4.202,37.452 U1.12
V_IN: C5.2 P1.1 U2.5
  other v1: 15.8,2.375 15.8,3.575
VSIM: C11.2 C12.2 U1.41 U3.8 | length 22.8
  L1 w0.254: U3.8 17.97,19.48 C11.2 C12.2 20.225,19.475 v3(20.25,19.5) ; U1.41 21.573,36.352 v3(21.575,36.35)
  L2 w0.254: v3(20.25,19.5) 20.25,35.025 v3(21.575,36.35)
pads on no net: Fid1.0 Fid2.0 Fid3.0 U1.2 U1.4 U1.6 U1.7 U1.8 U1.9 U1.15 U1.17 U1.19 U1.23 U1.25 U1.28 U1.29 U1.31 U1.33 U1.34 U1.35 U1.36 U1.37 U1.42 U1.44 U1.45 U1.46 U1.47 U1.48 U1.49 U1.54 U1.55 U1.57 U1.58 U1.59 U1.60 U1.61 U1.63 U1.64 U3.2 U3.4 U3.5 U3.9
copper on no net: | length 0.2
  L4 w0.254: 4.225,34.375 4.225,34.606
  other v2: 12.75,15.925 13.85,15.925 14.95,15.925 12.75,17.025 13.85,17.025 14.95,17.025 12.75,18.125 13.85,18.125 14.95,18.125 12.75,19.225 13.85,19.225 14.95,19.225

## Polygon pours and split planes (outlines as drawn)
GND on L1 "L1-GND" (solid, remove dead copper, pour order 17): 0,0 25,0 25,62.5 0,62.5
3v3 on L1 "L1-3v3" (solid, pour order 15): 15.65,8.125 16.5,8.125 16.5,12.625 15.125,12.625 15.125,9.375 15.625,8.875 15.65,8.875
V_IN on L1 "L1-VIN" (solid, pour order 14): 16.5,6.375 15.675,6.375 15.675,5.8 15.125,5.25 15.125,1.75 16.5,1.75
3v3 on L3 (PWR) "L3 (PWR)-3v3" (solid, remove dead copper, pour order 19): 0,0 25,0 25,62.5 0,62.5
V_IN on L3 (PWR) "L3-Vin" (solid, remove dead copper, pour order 16): 0,7.55 18.625,7.55 18.6,7.525 18.6,1.65 0,1.65
GND on L4 "L4-GND" (solid, remove dead copper, pour order 18): 0,0 25,0 25,62.5 0,62.5

## Keep-outs
Keep-Out Layer:
  the board outline again, w0.1

## Other copper
L1:
  pour cut-out: 15.45,49.35 16.875,49.35 16.875,51.625 15.425,51.625
  pour cut-out: 15.633,58.95 16.667,58.95 16.667,51.625 15.633,51.625
L2:
  pour cut-out: 15.446,49.323 16.871,49.323 16.871,51.598 15.421,51.598
  pour cut-out: 15.633,58.95 16.667,58.95 16.667,51.625 15.633,51.625
L3 (PWR):
  pour cut-out: 15.446,49.323 16.871,49.323 16.871,51.598 15.421,51.598
  pour cut-out: 15.633,58.95 16.667,58.95 16.667,51.625 15.633,51.625

## Silkscreen, mask and mechanical layers (free items; w line width, h text height)
Top Overlay:
  text "EE-NBIOT-01 / v1.1" at 0.775,58.2 h1.2
  text "SARA-N210" at 8.45,37.775 h1
  text "Reset SW" at 4.2,3.325 h1 r90
Bottom Overlay:
  text "RTS" at 6.75,41.375 h1
  text "CTS" at 6.75,38.875 h1
  text "TXD" at 6.75,36.225 h1
  text "RXD" at 6.75,33.675 h1
  text "GPIO1" at 8.25,31.35 h1
  text "RESET_N" at 10.725,28.65 h1
  text "GPIO2" at 8.55,26.1 h1
  text "I2C SDA" at 10.5,23.725 h1
  text "I2C SCL" at 10.5,21.1 h1
  text "GND" at 6.75,18.425 h1
  text "GND" at 6.75,15.925 h1
  text "3v3" at 6.75,13.575 h1
  text "3v3" at 6.75,10.825 h1
  text "GND" at 6.75,8.3 h1
  text "VCC: 1.8V - 5.5V" at 19.025,5.75 h1